# Altium PCB PCB1.PcbDoc
Units mil, origin at the board's own origin, x right, y up, seen from the top; angles counter-clockwise.
Board outline 1889.76 x 1102.36 mil, 2 copper layers (Top Layer, Bottom Layer); 25 components, 48 nets, 134 pads, 46 vias.
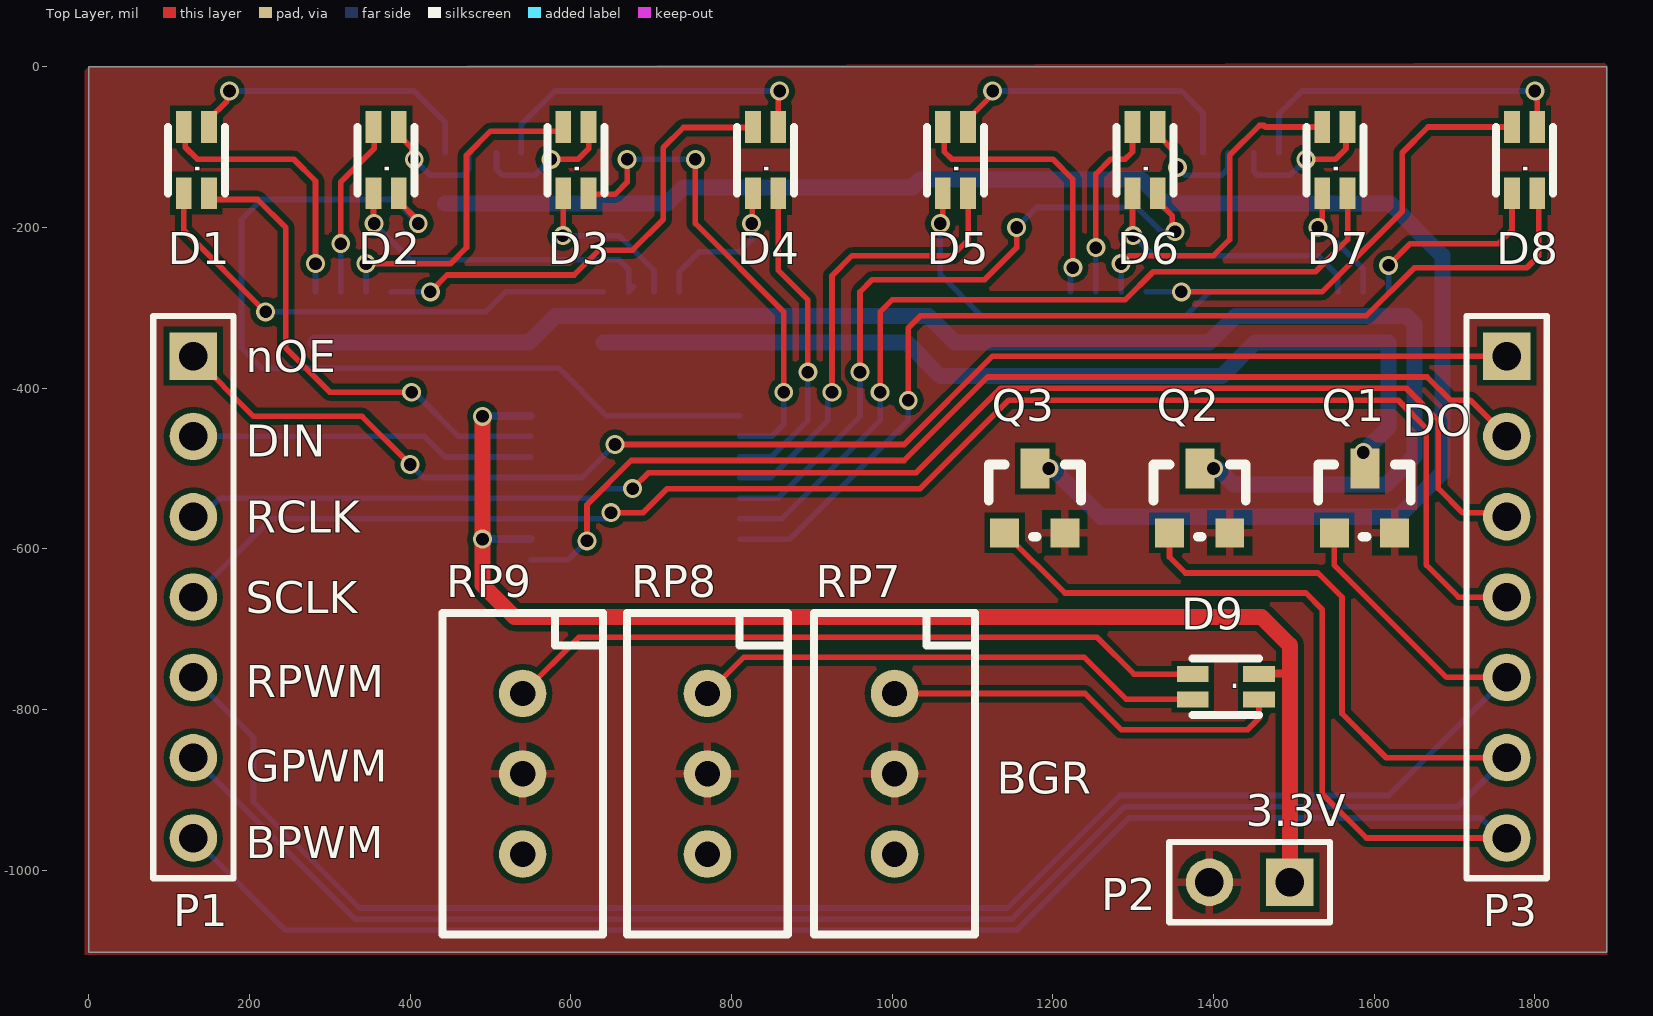
[diagram p0: Top Layer view]
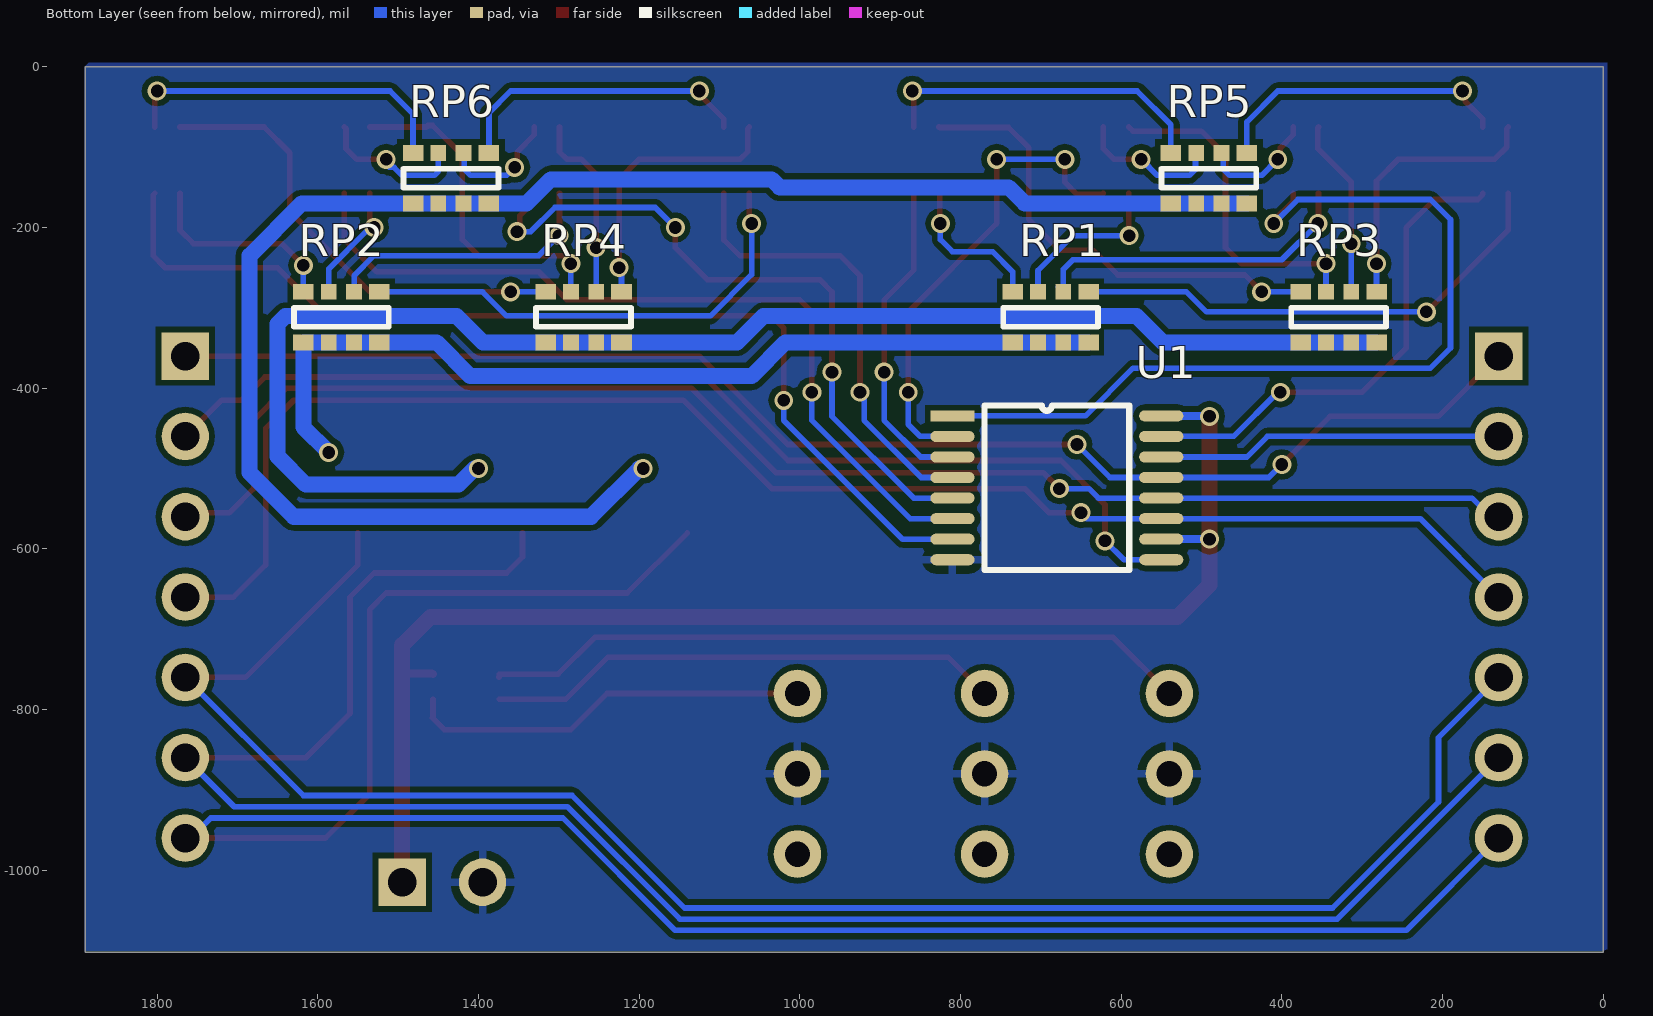
[diagram p1: Bottom Layer view, seen from below]

## Layer stack, top to bottom
Top Solder: solder mask 0.4, Solder Resist, Dk 3.5
Top Layer: signal copper 1.4
Dielectric 1: dielectric 12.6, FR-4, Dk 4.8
Bottom Layer: signal copper 1.4
Bottom Solder: solder mask 0.4, Solder Resist, Dk 3.5

## Board outline
0,-1102.36 0,0 1889.76,0 1889.76,-1102.36

## Design rules (kind name [scope] priority, off if disabled: settings)
Clearance [All] p1: gap=7 ignorepadtopadclearanceinfootprint=FALSE
PolygonConnect [All] p1: thpad.connectstyle=Relief thpad.reliefconductorwidth=10 thpad.reliefentries=4 thpad.polygonreliefangle="90 Angle" thpad.airgapwidth=10 smdpad.connectstyle=Relief smdpad.reliefconductorwidth=10 smdpad.reliefentries=4 smdpad.polygonreliefangle="90 Angle" smdpad.airgapwidth=10 via.connectstyle=Direct via.reliefconductorwidth=10 via.reliefentries=4 via.polygonreliefangle="90 Angle" via.airgapwidth=10
RoutingVias [All] p1: holewidth=15.75 width=23.62 viastyle="Through Hole" minholewidth=15.75 minwidth=23.62 maxholewidth=157.48 maxwidth=236.22
SolderMaskExpansion [All] p1: expansion=4
Width [All] p1: maxlimit=100 minlimit=7 preferedwidth=10
30 further rules are at their usual default settings.

## Components (designator, comment, footprint, x,y, rotation, side; value= is the part's Value field where it differs from the comment)
D1 "RGB_LED" 0805_RGB 118.11,-157.48 r90 top
D2 "RGB_LED" 0805_RGB 354.33,-157.48 r90 top
D3 "RGB_LED" 0805_RGB 590.55,-157.48 r90 top
D4 "RGB_LED" 0805_RGB 826.77,-157.48 r90 top
D5 "RGB_LED" 0805_RGB 1062.99,-157.48 r90 top
D6 "RGB_LED" 0805_RGB 1299.21,-157.48 r90 top
D7 "RGB_LED" 0805_RGB 1535.43,-157.48 r90 top
D8 "RGB_LED" 0805_RGB 1771.65,-157.48 r90 top
D9 "RGB_LED" 0805_RGB 1456.69,-787.4 r180 top
P1 "Header 7" HDR1X7 130,-360 r270 top
P2 "PWR" HDR1X2 1495,-1015 r180 top
P3 "Header 7" HDR1X7 1765,-360 r270 top
Q1 "AO3400" SOT-23 1550.5,-580 r0 top
Q2 "AO3400" SOT-23 1345.25,-580 r0 top
Q3 "AO3400" SOT-23 1140,-580 r0 top
RP1 "1K*4" 0603x4 640.51,-342.99 r0 bottom
RP2 "1K*4" 0603x4 1523.5,-342.99 r0 bottom
RP3 "1K*4" 0603x4 282.01,-342.99 r0 bottom
RP4 "1K*4" 0603x4 1222.01,-342.99 r0 bottom
RP5 "1K*4" 0603x4 443.5,-170 r0 bottom
RP6 "1K*4" 0603x4 1387.01,-170 r0 bottom
RP7 "ResAdj" RP_POT 1002.95,-780 r270 top value=1K
RP8 "ResAdj" RP_POT 770,-780 r270 top value=1K
RP9 "ResAdj" RP_POT 540,-780 r270 top value=1K
U1 "74HC595" TSSOP16 810,-434.41 r180 bottom

## Footprints (in the part's own frame and the unit in brackets; to place one, negate y for a bottom-side part, rotate by r counter-clockwise, add the part's x,y. Pads: shape width x height; smd on the part's side, far side on the other; paste and mask are expansions set on the pad)
0603x4 [mm]
  rect 0.65x0.5 smd: 1(0,0) 4(2.4,0) 5(2.4,-1.6) 8(0,-1.6)
  rect 0.5x0.5 smd: 2(0.8,0) 3(1.6,0) 6(1.6,-1.6) 7(0.8,-1.6)
  silkscreen extent -0.3,-1.1 2.7,-0.5
0805_RGB [mm]
  rect 1x0.5 smd: B(2.1,-0.8) COM(0,-0.8) G(2.1,0) R(0,0)
  silkscreen extent 0,-1.3 2.1,0.5
HDR1X2 [mm] "Connector; Header; 2 Position"
  rect 1.5x1.5 hole 0.9: 1(0,0)
  round 1.5 hole 0.9: 2(2.54,0)
  silkscreen extent -1.27,-1.27 3.81,1.27
HDR1X7 [mm] "Connector; Header; 7 Position"
  rect 1.5x1.5 hole 0.9: 1(0,0)
  round 1.5 hole 0.9: 2(2.54,0) 3(5.08,0) 4(7.62,0) 5(10.16,0) 6(12.7,0) 7(15.24,0)
  silkscreen extent -1.27,-1.27 16.51,1.27
RP_POT [mm]
  round 1.5 hole 0.8: 1(0,0) 2(2.54,0) 3(5.08,0)
  silkscreen extent -2.54,-2.54 7.62,2.54
SOT-23 [mil]
  rect 36x36 smd: 1(0,0) 2(75,0)
  rect 36x50 smd: 3(38,80)
  silkscreen extent -20,-5 95,85
TSSOP16 [mm]
  rect 1.4x0.35 smd: 1(0,0)
  oval 1.4x0.35 smd: 2(0,-0.65) 3(0,-1.3) 4(0,-1.95) 5(0,-2.6) 6(0,-3.25) 7(0,-3.9) 8(0,-4.55) 9(6.604,-4.55) 10(6.604,-3.9) 11(6.604,-3.25) 12(6.604,-2.6) 13(6.604,-1.95) 14(6.604,-1.3) 15(6.604,-0.65) 16(6.604,0)
  silkscreen extent 1.02,-4.88 5.59,0.33

## Part data
D1 D2 D3 D4 D5 D6 D7 D8 D9: library part RGBLED
P1 P3: "Header, 7-Pin", LatestRevisionDate=17-Jul-2002, LatestRevisionNote="Re-released for DXP Platform.", Publisher="Altium Limited"
P2: library part "Header 2", "Header, 2-Pin", LatestRevisionDate=17-Jul-2002, LatestRevisionNote="Re-released for DXP Platform.", Publisher="Altium Limited"
Q1 Q2 Q3: "N-Channel MOSFET", Published=8-Jun-2000, Publisher="Altium Limited", Revision="July-2002: Re-released for DXP Platform."
RP1 RP2 RP3 RP4 RP5 RP6: library part RPack_4
RP7 RP8 RP9: library part RPot, "Potentiometer", LatestRevisionDate=17-Jul-2002, LatestRevisionNote="Re-released for DXP Platform.", PackageDescription="Variable Resistor, Thru-Hole; 3 Leads", PackageReference=VR5, Published=8-Jun-2000, Publisher="Altium Limited", Set Position=0.5, Sim Note="Enter the Resistance value and the set point into parameter fields."
U1: "8-bit serial-in, serial or parallel-out shift register with output latches; 3-state"

## Via types
v1: diameter 23.62, hole 15.75, Top Layer to Bottom Layer, 46 vias

## Nets (pads, with @x,y where several pads share a name; then routed paths per layer and width w, separated by ;. In a path a pad name is that pad's centre, name@x,y a point inside that pad or via, vN(x,y) a via of type N, cw(c..) or ccw(c..) an arc to the next point about the centre after c; other vN are vias at no path point)
B0: D1.B RP5.8 | length 378.3
  Top Layer w7: D1.B 149.61,-64.96 171.82,-42.75 171.82,-33.18 v1(175,-30)
  Bottom Layer w7: v1(175,-30) 405,-30 443.5,-68.5 RP5.8
B1: D2.B RP5.7 | length 148.6
  Top Layer w7: D2.B 385.83,-84.65 401.82,-100.64 401.82,-111.82 v1(405,-115)
  Bottom Layer w7: v1(405,-115) 425,-135 465,-135 472.65,-127.35 472.65,-109.36 RP5.7
B2: D3.B RP5.6 | length 179.3
  Top Layer w7: v1(575,-115) 608.87,-115 622.05,-101.82 D3.B
  Bottom Layer w7: RP5.6 507.35,-107.86 507.35,-127.35 515,-135 555,-135 v1(575,-115)
B3: D4.B RP5.5 | length 419.9
  Top Layer w7: D4.B 858.27,-31.73 v1(860,-30)
  Bottom Layer w7: RP5.5 537.99,-72.01 580,-30 v1(860,-30)
B4: D5.B RP6.8 | length 380.6
  Top Layer w7: D5.B 1094.49,-64.96 1125,-34.45 v1(1125,-30)
  Bottom Layer w7: v1(1125,-30) 1360,-30 1387.01,-57.01 RP6.8
B5: D6.B RP6.7 | length 150.9
  Top Layer w7: D6.B 1330.71,-84.65 1351.82,-105.76 1351.82,-121.82 v1(1355,-125)
  Bottom Layer w7: v1(1355,-125) 1365,-135 1410,-135 1417.65,-127.35 1417.65,-107.86 RP6.7
B6: D7.B RP6.6 | length 185.1
  Top Layer w7: v1(1515,-115) 1551.82,-115 1565,-101.82 1565,-76.73 D7.B
  Bottom Layer w7: RP6.6 1450,-130 1455,-135 1495,-135 1505,-125 1510.9,-125 1511.82,-124.08 1511.82,-118.18 v1(1515,-115)
B7: D8.B RP6.5 | length 424.9
  Top Layer w7: v1(1800,-30) 1803.15,-33.15 D8.B
  Bottom Layer w7: RP6.5 1481.5,-58.5 1510,-30 v1(1800,-30)
BBUS: P1.7 P3.7 Q3.1 | length 2667.9
  Top Layer w7: Q3.1 1215,-655 1515,-655 1535.43,-675.43 1535.43,-905 1590.43,-960 P3.7
  Bottom Layer w7: P1.7 245,-1075 1155,-1075 1295,-935 1733.39,-935 1758.39,-960 P3.7
DIN: P1.2 U1.14 | length 430.6
  Bottom Layer w7: P1.2 417.91,-460 443.5,-485.59 U1.14
DOUT: P3.2 U1.9 | length 1366.3
  Top Layer w7: v1(620,-590) 620,-545 675,-490 1014.8,-490 1118.8,-386 1666,-386 1695,-415 1720,-415 P3.2
  Bottom Layer w7: U1.9 596.46,-613.54 v1(620,-590)
G0: D1.G RP3.8 | length 343.4
  Top Layer w7: D1.G 120,-76.69 120,-100 135,-115 255,-115 282.01,-142.01 v1(282.01,-245)
  Bottom Layer w7: RP3.8 v1(282.01,-245)
G1: D2.G RP3.7 | length 222.7
  Top Layer w7: v1(313.5,-220) 313.5,-143.32 355,-101.82 355,-75.47 D2.G
  Bottom Layer w7: RP3.7 v1(313.5,-220)
G2: D3.G RP3.6 | length 418.4
  Top Layer w7: v1(345,-245) 450,-245 470,-225 470,-110 500,-80 585.35,-80 D3.G
  Bottom Layer w7: RP3.6 v1(345,-245)
G3: D4.G RP3.5 | length 587.7
  Top Layer w7: v1(425,-280) 446,-259 604.11,-259 635,-228.11 676.89,-228.11 715,-190 715,-100.47 740,-75.47 826.1,-75.47 D4.G
  Bottom Layer w7: RP3.5 v1(425,-280)
G4: D5.G RP4.8 | length 347.2
  Top Layer w7: D5.G 1065,-76.81 1065,-105.76 1074.24,-115 1200,-115 1225,-140 v1(1225,-250)
  Bottom Layer w7: RP4.8 1222.01,-252.99 v1(1225,-250)
G5: D6.G RP4.7 | length 234.8
  Top Layer w7: v1(1253.5,-225) 1253.5,-133.32 1271.82,-115 1290,-115 1299.21,-105.79 D6.G
  Bottom Layer w7: RP4.7 v1(1253.5,-225)
G6: D7.G RP4.6 | length 419
  Top Layer w7: v1(1285,-245) 1295,-235 1400,-235 1420,-215 1420,-110 1457.1,-72.9 1462.9,-72.9 1464.8,-74.8 D7.G
  Bottom Layer w7: RP4.6 v1(1285,-245)
G7: D8.G RP4.5 | length 583
  Top Layer w7: v1(1360,-280) 1535,-280 1635,-180 1635,-106.82 1667.02,-74.8 D8.G
  Bottom Layer w7: RP4.5 v1(1360,-280)
GBUS: P1.6 P3.6 Q2.1 | length 2439.9
  Top Layer w7: Q2.1 1345.25,-610.25 1365,-630 1530,-630 1560,-660 1560,-805 1615,-860 P3.6
  Bottom Layer w7: P1.6 331,-1061 1149.2,-1061 1289.2,-921 1704,-921 P3.6
GND: P2.2 Q1.2 Q2.2 Q3.2 RP7.2 RP8.2 RP9.2 U1.8
LD0: D1.COM U1.15 | length 614.3
  Top Layer w7: D1.COM 149.61,-158.66 155.95,-165 210,-165 245,-200 245,-350 300,-405 v1(401.82,-405)
  Bottom Layer w7: v1(401.82,-405) 405,-405 460,-460 U1.15
LD1: D2.COM U1.1 | length 1105.3
  Top Layer w7: D2.COM 385.83,-167.32 410,-191.5 v1(410,-195)
  Bottom Layer w7: v1(410,-195) 380,-165 215,-165 190,-190 190,-350 215,-375 585,-375 644.41,-434.41 U1.1
LD2: D3.COM U1.2 | length 605.1
  Top Layer w7: D3.COM 623.22,-158.66 655,-158.66 670,-143.66 v1(670,-115) ; v1(755,-115) 755,-195 865,-305 v1(865,-405)
  Bottom Layer w7: v1(670,-115) v1(755,-115) ; U1.2 850,-460 865,-445 v1(865,-405)
LD3: D4.COM U1.3 | length 401.6
  Top Layer w7: D4.COM 858.27,-253.27 895,-290 v1(895,-380)
  Bottom Layer w7: U1.3 849.41,-485.59 895,-440 v1(895,-380)
LD4: D5.COM U1.4 | length 568
  Top Layer w7: v1(925,-405) 925,-260 950,-235 1075,-235 1094.49,-215.51 D5.COM
  Bottom Layer w7: U1.4 848.82,-511.18 920,-440 920,-409.1 924.1,-405 v1(925,-405)
LD5: D6.COM U1.5 | length 866.1
  Top Layer w7: v1(960,-380) 960,-280 975,-265 1115,-265 1155,-225 v1(1155,-200) ; D6.COM 1330.71,-167.32 1348.83,-185.44 1348.83,-201.82 v1(1352.01,-205)
  Bottom Layer w7: U1.5 858.23,-536.77 960,-435 v1(960,-380) ; v1(1155,-200) 1180,-175 1305,-175 1335,-205 v1(1352.01,-205)
LD6: D7.COM U1.6 | length 1037.4
  Top Layer w7: v1(985,-405) 985,-305 1000,-290 1290,-290 1325,-255 1526.93,-255 1566.93,-215 D7.COM
  Bottom Layer w7: U1.6 862.64,-562.36 985,-440 v1(985,-405)
LD7: D8.COM U1.7 | length 1286.8
  Top Layer w7: v1(1020,-415) 1020,-325 1035,-310 1590,-310 1650,-250 1790,-250 1805,-235 1805,-159.33 D8.COM
  Bottom Layer w7: U1.7 872.05,-587.95 1020,-440 v1(1020,-415)
NetD9_B: D9.B RP9.1 | length 882.4
  Top Layer w7: RP9.1 610,-710 1255,-710 1300.91,-755.91 D9.B ; D9.B@1374.02,-760 D9.B@1374.42,-760
NetD9_G: D9.G RP8.1 | length 644.4
  Top Layer w7: RP8.1 815,-735 1239.21,-735 1291.61,-787.4 D9.G
NetD9_R: D9.R RP7.1 | length 502.5
  Top Layer w7: RP7.1 1240,-780 1285,-825 1442.6,-825 1457.6,-810 1456.69,-809.09 D9.R
NetQ1_3: Q1.3 RP1.1 RP1.2 RP1.3 RP1.4 RP2.1 RP2.2 RP2.3 RP2.4 | length 1162.3
  Bottom Layer w20: RP1.1 RP1.2 RP1.3 RP1.4 1017.99,-342.99 1060,-385 1410.25,-385 1452.26,-342.99 RP2.1 RP2.2 RP2.3 RP2.4 1617.99,-448.5 v1(1586.5,-480)
NetQ2_3: Q2.3 RP3.1 RP3.2 RP3.3 RP3.4 RP4.1 RP4.2 RP4.3 RP4.4 | length 1850.9
  Bottom Layer w20: RP3.1 RP3.2 RP3.3 RP3.4 548.07,-342.99 581.06,-310 1045,-310 1077.99,-342.99 RP4.1 RP4.2 RP4.3 RP4.4 1394.66,-342.99 1427.65,-310 1640,-310 1650,-320 1650,-485 1615,-520 1425,-520 1405,-500 v1(1400,-500)
NetQ3_3: Q3.3 RP5.1 RP5.2 RP5.3 RP5.4 RP6.1 RP6.2 RP6.3 RP6.4 | length 2100.9
  Bottom Layer w20: RP5.1 RP5.2 RP5.3 RP5.4 720,-170 740,-150 1025,-150 1035,-140 1310,-140 1340,-170 RP6.1 RP6.2 RP6.3 RP6.4 1620,-170 1685,-235 1685,-505 1630,-560 1260,-560 1200,-500 v1(1195,-500)
nOE: P1.1 P3.1 U1.13 | length 1760.2
  Top Layer w7: P1.1 205,-435 340,-435 v1(400,-495) ; v1(655,-470) 1015,-470 1125,-360 P3.1
  Bottom Layer w7: v1(400,-495) 416.18,-511.18 U1.13 613.82,-511.18 v1(655,-470)
R0: D1.R RP1.8 | length 620.6
  Top Layer w7: D1.R 118.11,-203.11 v1(220,-305)
  Bottom Layer w7: v1(220,-305) 493.78,-305 518.78,-280 RP1.8
R1: D2.R RP1.7 | length 414.9
  Top Layer w7: D2.R 354.33,-194.33 v1(355,-195)
  Bottom Layer w7: v1(355,-195) 400,-240 660,-240 672.01,-252.01 672.01,-273.66 672.25,-273.9 678.1,-273.9 RP1.7
R2: D3.R RP1.6 | length 210.8
  Top Layer w7: v1(590,-210) 590.28,-209.72 590.28,-157.76 D3.R
  Bottom Layer w7: v1(590,-210) 660,-210 703.5,-253.5 RP1.6
R3: D4.R RP1.5 | length 189.8
  Top Layer w7: v1(825,-195) 825.89,-194.11 825.89,-158.37 D4.R
  Bottom Layer w7: RP1.5 735,-255 760,-230 810,-230 825,-215 v1(825,-195)
R4: D5.R RP2.8 | length 599.6
  Top Layer w7: v1(1060,-195) 1062.99,-192.01 D5.R
  Bottom Layer w7: v1(1060,-195) 1060,-258.66 1111.34,-310 1365,-310 1395,-280 RP2.8
R5: D6.R RP2.7 | length 348.6
  Top Layer w7: D6.R 1299.21,-209.21 v1(1300,-210)
  Bottom Layer w7: v1(1300,-210) 1325,-235 1530,-235 1554.66,-259.66 1554.66,-279.66 RP2.7
R6: D7.R RP2.6 | length 151.1
  Top Layer w7: v1(1530,-200) 1530,-195.5 1535.43,-190.07 D7.R
  Bottom Layer w7: v1(1530,-200) 1534.5,-200 1539.5,-205 1540,-205 1586.5,-251.5 RP2.6
R7: D8.R RP2.5 | length 250.6
  Top Layer w7: v1(1617.99,-247.01) 1645,-220 1755,-220 1771.65,-203.35 D8.R
  Bottom Layer w7: RP2.5 v1(1617.99,-247.01)
RBUS: P1.5 P3.5 Q1.1 | length 2232.5
  Top Layer w7: Q1.1 1550.5,-620.5 1690,-760 P3.5
  Bottom Layer w7: P1.5 204.91,-834.91 204.91,-915.11 336.8,-1047 1143.4,-1047 1283.4,-907 1618,-907 P3.5
RCK: P1.3 P3.3 U1.12 | length 1817.3
  Top Layer w7: v1(676.89,-525) 696.89,-505 1030,-505 1135,-400 1640,-400 1680,-440 1680,-525 1710,-555 1760,-555 P3.3
  Bottom Layer w7: P1.3 140.15,-560 163.38,-536.77 U1.12 628.23,-536.77 640,-525 v1(676.89,-525)
SCK: P1.4 P3.4 U1.11 | length 1937.5
  Top Layer w7: v1(650,-555) 690,-555 720,-525 1035,-525 1145,-415 1630,-415 1665,-450 1665,-620 1705,-660 P3.4
  Bottom Layer w7: P1.4 227.64,-562.36 U1.11 642.64,-562.36 v1(650,-555)
VCC: D9.COM P2.1 U1.10 U1.16 | length 1700
  Top Layer w10: D9.COM 1457.6,-755 1495,-755
  Top Layer w20: v1(490,-435) v1(490,-587.95) 490,-645 530,-685 1460,-685 1495,-720 1495,-755 P2.1
  Bottom Layer w10: v1(490,-587.95) U1.10 ; v1(490,-435) 490.59,-434.41 U1.16
pads on no net: RP7.3 RP8.3 RP9.3

## Polygon pours and split planes (outlines as drawn)
GND on Top Layer (solid, pour order 0): 0,0 -5,-5 -5,-1105 1890,-1105 1890,5
GND on Bottom Layer (solid, pour order 2): -5,5 -5,-1105 0,-1100 1890,-1100 1890,0 1885,5

## Silkscreen, mask and mechanical layers (free items; w line width, h text height)
Top Overlay:
  text "nOE" at 195,-380 h40
  text "DO" at 1635,-460 h40
  text "DIN" at 195,-485 h40
  text "RCLK" at 195,-580 h40
  text "SCLK" at 195,-680 h40
  text "RPWM" at 195,-785 h40
  text "GPWM" at 195,-890 h40
  text "BGR" at 1130,-905 h40
  text "3.3V" at 1440.25,-945 h40
  text "BPWM" at 195,-985 h40
Mechanical 1:
  the board outline again, w10